# Altium PCB LM2576_V1.0.pcbdoc
Units mil, origin at the board's own origin, x right, y up, seen from the top; angles counter-clockwise.
Board outline 6000 x 4000 mil, 2 copper layers (Top Layer, Bottom Layer); 33 components, 13 nets, 184 pads, 0 vias.
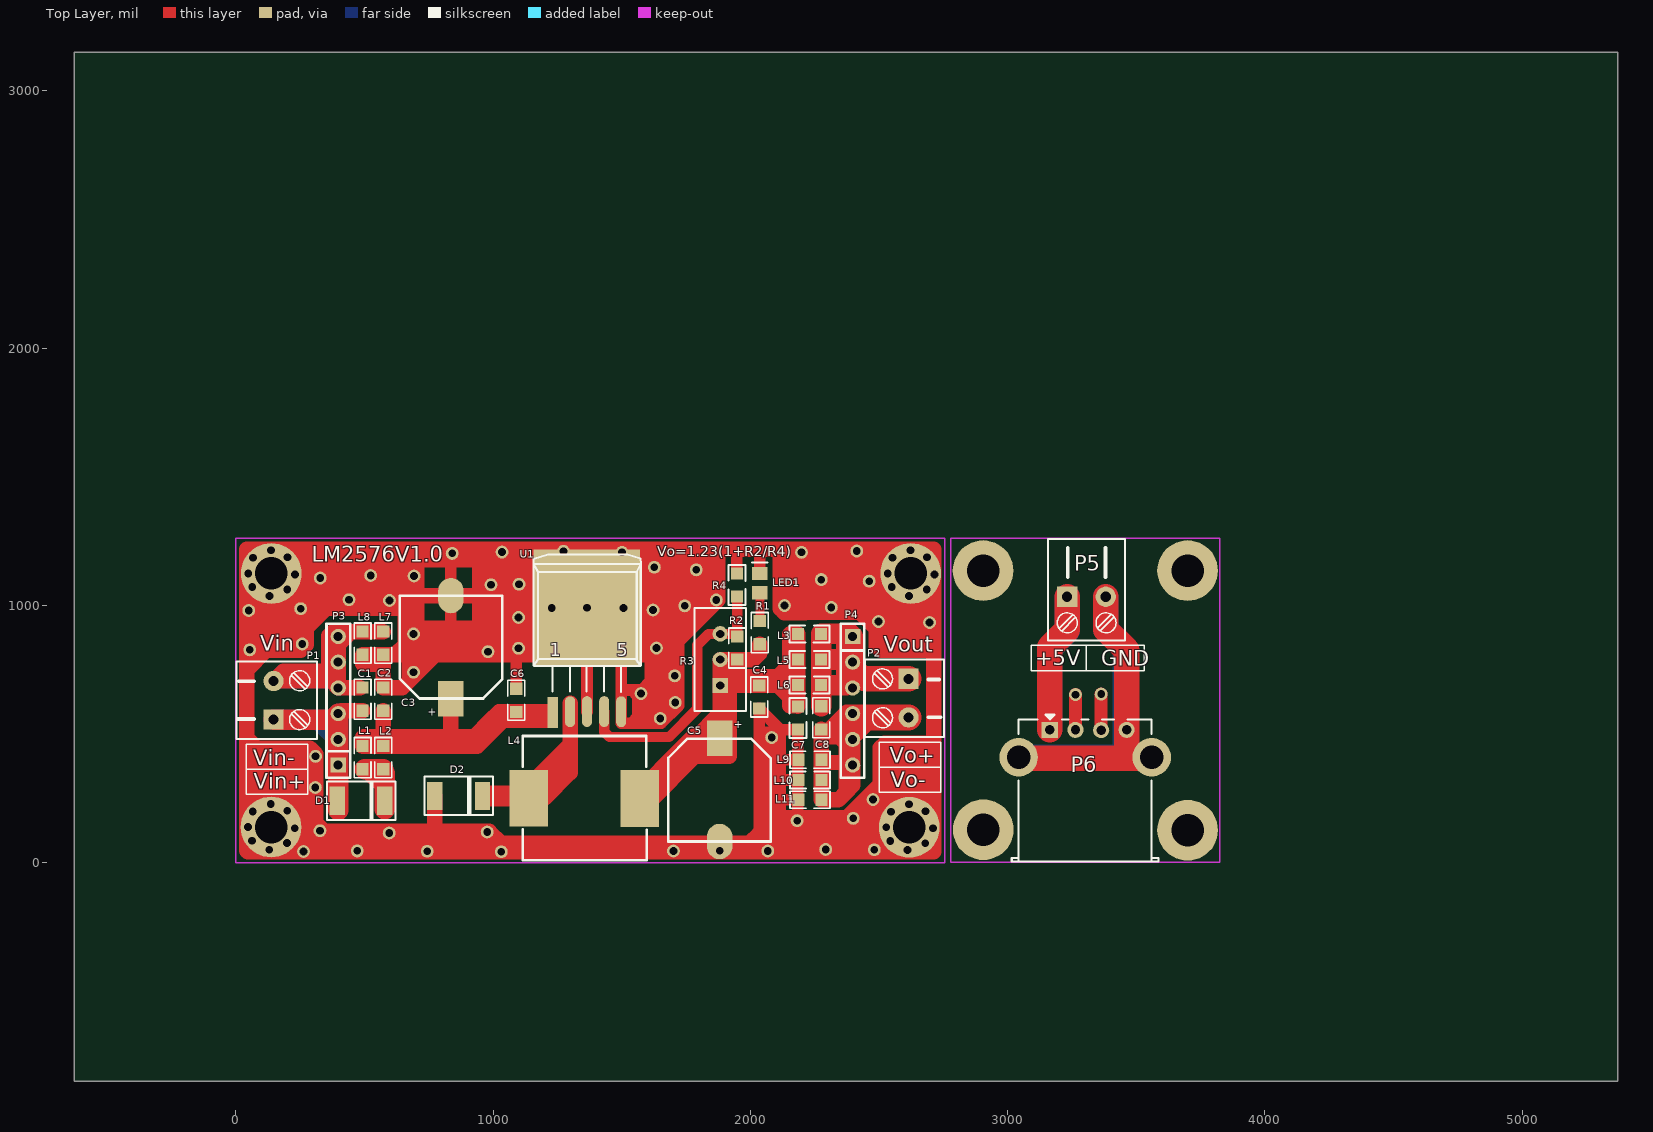
[diagram p0: Top Layer view]
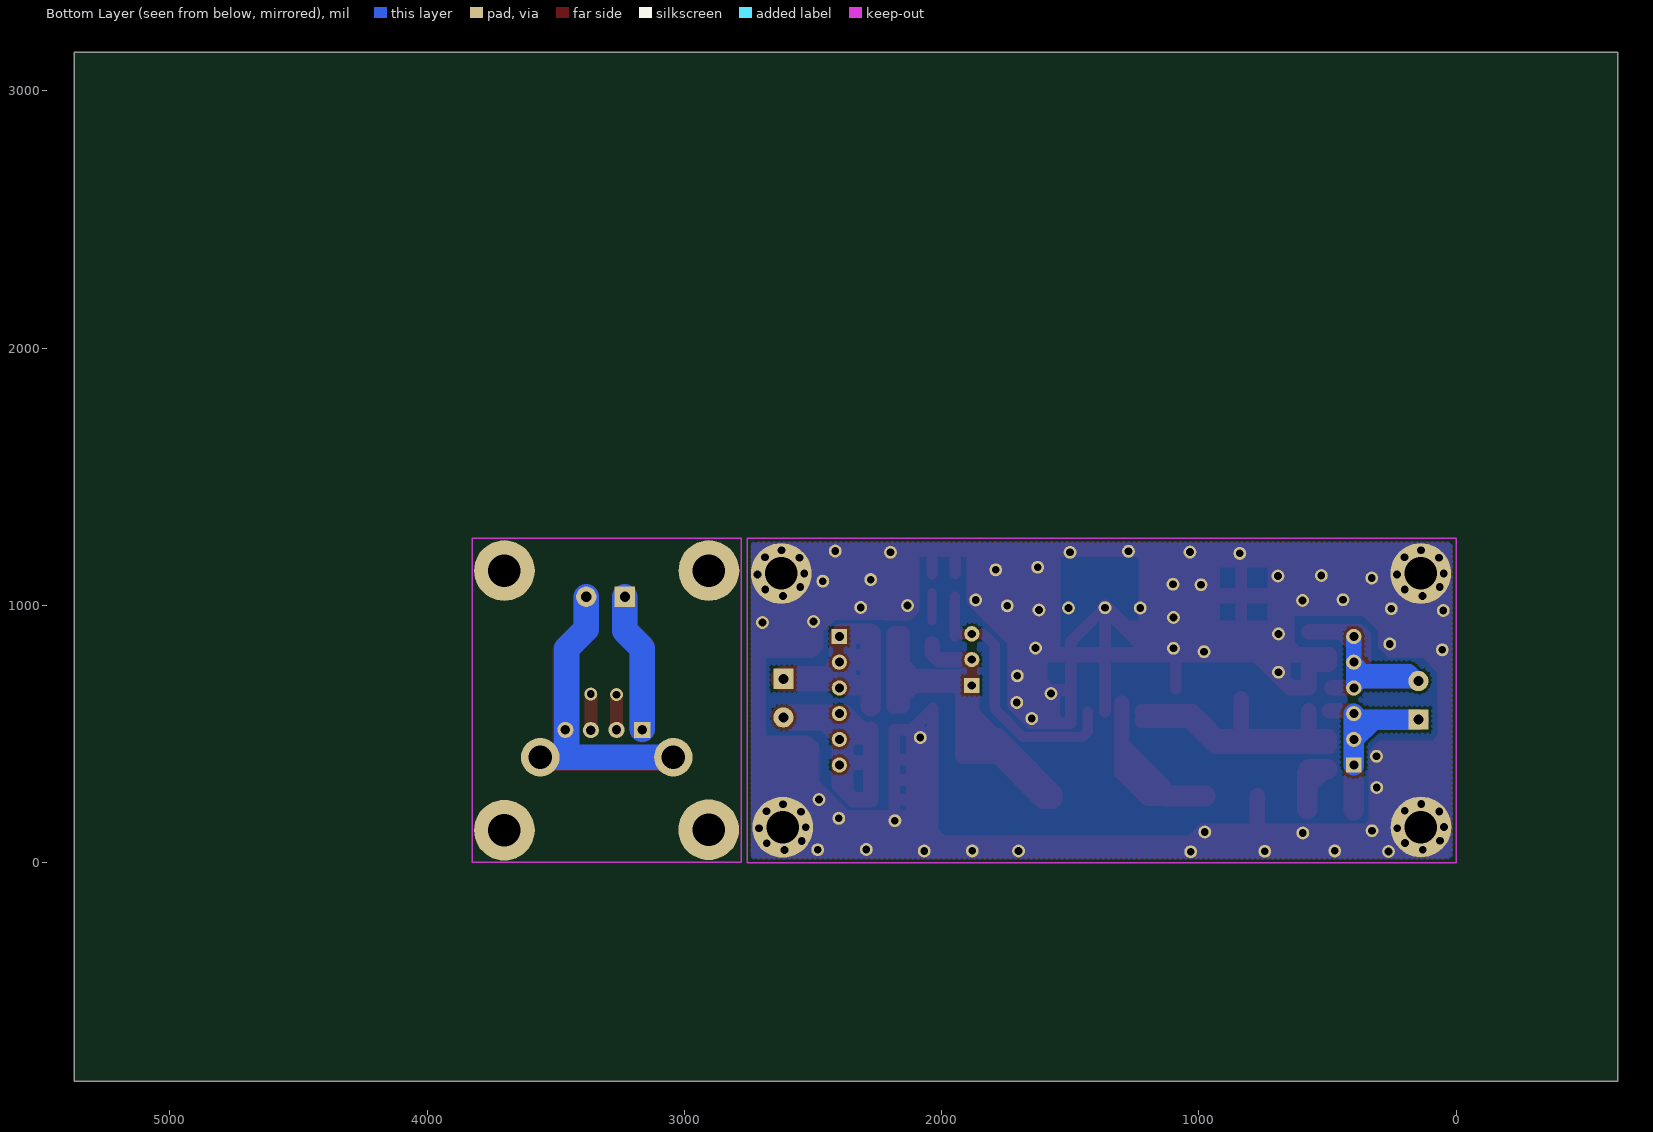
[diagram p1: Bottom Layer view, seen from below]

## Layer stack, top to bottom
Top Solder: solder mask 0.4, Solder Resist, Dk 3.5
Top Layer: signal copper 1.4
Dielectric 1: dielectric 12.6, FR-4, Dk 4.8
Bottom Layer: signal copper 1.4
Bottom Solder: solder mask 0.4, Solder Resist, Dk 3.5

## Board outline
-628,-850 5372,-850 5372,3150 -628,3150

## Design rules (kind name [scope] priority, off if disabled: settings)
Clearance [All] p1: gap=10
ComponentClearance [All] p1 off: gap=10 collisioncheckmode=3 verticalgap=10 showdistances=FALSE
MinimumSolderMaskSliver [All] p1 off: minsoldermaskwidth=10
PlaneConnect [All] p1: planeconnectstyle=Direct reliefexpansion=20 reliefentries=4 reliefconductorwidth=10 reliefairgap=10
PolygonConnect [All] p1: connectstyle=Direct reliefconductorwidth=10 reliefentries=4 polygonreliefangle="90 Angle" airgapwidth=10
RoutingVias [All] p1: holewidth=28 width=50 viastyle="Through Hole" minholewidth=28 minwidth=50 maxholewidth=28 maxwidth=50
SilkToBoardRegionClearance [All] p1 off:
SilkToSilkClearance [All] p1 off: silktosilkclearance=10
SilkToSolderMaskClearance [IsPad] p1 off: minsilkscreentomaskgap=10 clearancetoexposedcopper=TRUE
SolderMaskExpansion [All] p1: expansion=4
Width [All] p1: maxlimit=10000 minlimit=10 preferedwidth=10 minimp=50.000000 maximp=50.000000 favimp=50.000000
24 further rules are at their usual default settings.

## Components (designator, comment, footprint, x,y, rotation, side; value= is the part's Value field where it differs from the comment)
C1 "0.1U" 0805 493,680 r270 top
C2 "0.1U" 0805 573,680 r270 top
C3 "470/25V" "电容 铝电解 470U/35V" 836,638 r0 top
C4 "104" 0805 2035,599 r90 top
C5 "470/25V" "电容 铝电解 470U/35V" 1881,482 r180 top
C6 "104" 0805 1090,676 r270 top
C7 "0.1U" 0805 2185,517 r90 top
C8 "0.1U" 0805 2276,518 r90 top
D1 "IN4007" "二极管 贴片 4007" 394,240 r0 top
D2 "IN5822" "二极管 贴片 4007" 774,259 r0 top
L1 "磁珠" 0805 493,453 r270 top
L2 "磁珠" 0805 573,453 r270 top
L3 "磁珠" 0805 2185,889 r0 top
L4 "330uH" "电感 贴片 12*12" 1141,249 r0 top
L5 "磁珠" 0805 2185,789.5 r0 top
L6 "磁珠" 0805 2185,690 r0 top
L7 "磁珠" 0805 573,808 r90 top
L8 "磁珠" 0805 493,808 r90 top
L9 "磁珠" 0805 2187,400 r0 top
L10 "磁珠" 0805 2187,321 r0 top
L11 "磁珠" 0805 2187,244 r0 top
LED1 "红色" LED0805 2037,1049 r90 top
P1 "KF3.81-2P" KF127S-3.81-2P 316,481 r90 top
P2 "KF3.81-2P" KF127S-3.81-2P 2446,789 r270 top
P3 "2.54 1*6" "单排插针 2.54 1*6" 398,379 r90 top
P4 "2.54 1*6" "单排插针 2.54 1*6" 2398,879 r270 top
P5 "KF3.81-2P" KF127S-3.81-2P 3157,864 r0 top
P6 "USB座" "USB座 母头1 侧卧" 3165,515 r270 top
R1 "2K" 0805 2037,939 r270 top
R2 "6.2K" 0805 1949,789 r90 top
R3 "103" 电位器 1883,689 r90 top
R4 "2K" 0805 1948,1034 r90 top
U1 "LM2576SX-ADJ" "TO263 LM2576" 1232,583 r0 top

## Footprints (in the part's own frame and the unit in brackets; to place one, negate y for a bottom-side part, rotate by r counter-clockwise, add the part's x,y. Pads: shape width x height; smd on the part's side, far side on the other; paste and mask are expansions set on the pad)
0805 [mm]
  rect 1.2x1.2 smd: 1(0,0) 2(2.286,0)
  silkscreen extent -0.84,-0.84 3.12,0.84
KF127S-3.81-2P [mm]
  rect 2x2 hole 1: 1(1.9,4.3)
  round 2 hole 1: 2(5.71,4.3)
  silkscreen extent 0,0 7.62,7.98
LED0805 [mm] "Chip Capacitor; Body 2.0 x 1.2 mm (LxW typ)"
  rect 1.3x1.5 smd: 1(0,0) 2(1.9,0)
  silkscreen extent 2.98,-0.76 2.98,0.76
"TO263 LM2576" [mil]
  rect 39.17x120 smd: 1(0,1)
  oval 39.17x120 smd: 2(67.5,3.5) 3(133,4) 4(200,4) 5(266,3.5)
  rect 413.39x450 smd: 3(131.98,408.99)
  silkscreen extent -76,81 342,614
"USB座 母头1 侧卧" [mm] "Connector; USB1.1, Reverse Type, Thru-Hole; 4 Position; Right Angle"
  rect 1.6x1.6 hole 0.92: 1(-0.025,-0.025)
  round 1.6 hole 0.92: 2(-0.025,2.515) 3(0,5.055) 4(-0.025,7.569)
  round 3.8 hole 2.3: 5(2.685,10.045) 6(2.685,-3.095)
  silkscreen extent -1.52,-3.78 12.96,10.72
"二极管 贴片 4007" [mil]
  rect 60x110 smd: 1(0,0) 2(185,0)
  silkscreen extent -40,-74 226,75
"单排插针 2.54 1*6" [mm]
  rect 1.5x1.5 hole 0.889: 1(0,0)
  round 1.5 hole 0.889: 2(2.54,0) 3(5.08,0) 4(7.62,0) 5(10.16,0) 6(12.7,0)
  silkscreen extent -1.26,-1.18 13.97,1.15
电位器 [mm] "Potentiometer; 3 Leads"
  rect 1.5x1.5 hole 0.8: 1(0,0)
  round 1.5 hole 0.8: 2(2.54,0)
  oval 1.53x1.5 hole 0.8: 3(5.08,0)
  silkscreen extent -2.54,-2.54 7.62,2.54
"电容 铝电解 470U/35V" [mm]
  rect 2.5x3.5 smd: 1(0,-0.025)
  oval 2.5x3.5 smd: 2(0,10.16)
  silkscreen extent -5.05,0 5.08,10.16
"电感 贴片 12*12" [mil]
  rect 150x220 smd: 1(-2,1) 2(429,0)
  silkscreen extent -25,-240 457,243

## Part data
C1 C2 C7 C8: library part CAP
C3 C5: library part "电容 贴片 铝电解 470u/25V"
C4 C6: library part "电容 贴片 0805"
D1: library part DIODE
D2: library part "二极管 贴片4007"
L1 L2 L3 L5 L6 L7 L8 L9 L10 L11 R1: library part RES2
L4: library part "电感 贴片 0805"
LED1: library part "二极管 贴片发光 0805"
P1 P2 P5: library part "联结件 XH2.54-2"
P3 P4: library part "连接件 单排插针 2.54 1*6"
P6: library part "连接件 USB座"
R2 R4: library part "电阻 贴片 0805"
R3: library part "电位器 3296"
U1: library part LM2576SX-5.0, "DC-DCоƬ"

## Free pads (board coordinates)
  round 236.22 hole 125.98: 0(137,138) 0(138,1124) 0(2618,137) 0(2624,1124) 0(2905,1135) 0(2906,128) 0(3700,126) 0(3700,1135)
  round 50 hole 30: 1(47,138) 1(48,1124) 1(2528,137) 1(2534,1124) 2(229,134) 2(230,1120) 2(2710,133) 2(2716,1120) 3(136,228) 3(137,1214) 3(2617,227) 3(2623,1214) 4(130,50) 4(131,1036) 4(2611,49) 4(2617,1036) 5(63,85) 5(64,1071) 5(2544,84) 5(2550,1071) 6(199,76) 6(200,1062) 6(2680,75) 6(2686,1062) 7(200,201) 7(201,1187) 7(2681,200) 7(2687,1187) 8(66,199) 8(67,1185) 8(2547,198) 8(2553,1185) 9(54,827) 10(50,980) 11(258,850) 12(252,987) 12(263,43) 12(309,292) 12(310,413) 12(327,124) 12(328,1106) 12(440,1022) 12(472,45.5) 12(524,1116) 12(596,115) 12(597,1019) 12(691,740) 12(691,889) 12(693,1114) 12(744,44) 12(841,1202) 12(977,119) 12(980,820) 12(992,1080) 12(1032,42) 12(1035,1207) 12(1099,833) 12(1099,953) 12(1101,1082) 12(1228,990) 12(1274,1210) 12(1365,990.97) 12(1501,1206) 12(1507,990) 12(1575,657) 12(1622,982) 12(1627,1148) 12(1635,834) 12(1650,560) 12(1701,45) 12(1706,726) 12(1708,622) 12(1745,998) 12(1790,1138) 12(1868,1021) 12(1881,45.5) 12(2068,45) 12(2083,486) 12(2133,999) 12(2182,163) 12(2199,1206) 12(2276,1100) 12(2293,51) 12(2315,992) 12(2400,172) 12(2414,1211) 12(2462,1094) 12(2477,245) 12(2482,50) 12(2498,937) 12(2697,933) 13(3264,653) 14(3364,655)

## Nets (pads, with @x,y where several pads share a name; then routed paths per layer and width w, separated by ;. In a path a pad name is that pad's centre, name@x,y a point inside that pad or via, vN(x,y) a via of type N, cw(c..) or ccw(c..) an arc to the next point about the centre after c; other vN are vias at no path point)
GND: C2.1 C3.2 C4.1 C5.2 C6.1 C7.1 D2.1 L7.1 L8.1 L9.1 L10.1 L11.1 LED1.2 pad.0@137,138 pad.0@138,1124 pad.0@2618,137 pad.0@2624,1124 pad.1 pad.2 pad.3 pad.4 pad.5 pad.6 pad.7 pad.8 pad.9 pad.10 pad.11 pad.12 R4.2 U1.3 U1.5 | length 24938.6
  Top Layer w45: 830,912 836,918 C3.2 836,1177 836,1216.5 pad.12@837,1217.5 ; 1087,1217.5 1090,1214.5 1090,1178 1090,912 1090,867 1090,808 C6.1 ; U1.3@1363.98,991.99 U1.3@1365,990.97 ; U1.3@1365,587 1365,808 U1.3@1365,990.97 ; 1611,808 1611,705 1577,671 1539,671 ; 1881,1217.5 1881,1018 1722,859 1722,610 1653,541 1537,541 ; R4.2 1948,1213.5 1952,1217.5 ; 2037,42.5 2035,44.5 2035,76 2035,113.5 2035,507 ; LED1.2 2037,1215.5 2039,1217.5 ; 2182,42.5 2185,45.5 2185,76 pad.12@2185,181.5 ; L11.1 L11.1@2185,244 ; L10.1 L10.1@2185,321 ; L9.1 L9.1@2185,400 ; 2712.5,471 2521,471 2498,448 2498,306 2373.5,181.5 pad.12@2185,181.5 ; U1.3@1365,990.97 1498,857.97 1498,808 1498,671 ; 1498,671 U1.5 1498,541 1537,541 ; 1498,671 1539,671 ; 1537,541 1563,567 1563,647 1539,671 ; 2035,507 pad.12@2076,507 ; 2035,507 C4.1 2117,517 ; pad.12@2076,507 2076,150 2076,94 2094,76 2117,99 2117,186 ; pad.12@2076,507 2107,507 2117,517 ; 2117,186 2117,244 ; 2117,186 2121.5,181.5 pad.12@2185,181.5 ; 2117,244 2117,326 ; 2117,244 L11.1@2185,244 ; 2117,326 2117,408 ; 2117,326 2122,321 L10.1@2185,321 ; 2117,408 2117,517 ; 2117,408 2125,400 L9.1@2185,400 ; 2117,517 C7.1 L9.1@2185,400 ; pad.12@2185,181.5 L11.1@2185,244 ; L11.1@2185,244 L10.1@2185,321 ; L10.1@2185,321 L9.1@2185,400
  Top Layer w60: 42.5,622 42.5,483.5 ; D2.1 774,43.5 775,42.5 ; 989,1029 980,1038 948,1038 ; pad.12@1055,51 1030,76 ; 1090,1178 1089,1177 948,1177 ; U1.3@1363.98,991.99 U1.3@1283.99,912 ; 2076,150 2071.5,150 2035,113.5 1997.5,76 ; 42.5,483.5 42.5,749.5 ; 42.5,483.5 42.5,46 46,42.5 775,42.5 ; 42.5,483.5 85,441 89,445 288,445 311,422 311,154 344,121 985,121 1030,76 ; 42.5,749.5 42.5,1217.5 659,1217.5 ; 42.5,749.5 119,826 252,826 273,847 273,911 350,988 659,988 ; 573,771 496,771 495,770 493,772 L8.1 L7.1 ; 573,771 L7.1 ; 573,771 C2.1 647,680 674.5,707.5 ; L7.1 619,808 ; 619,808 704,808 ; 619,808 659,848 659,988 ; 659,988 659,1038 ; 659,1038 659,1177 ; 659,1038 704,1038 ; 659,1177 659,1217.5 ; 659,1177 704,1177 ; 659,1217.5 704,1217.5 ; 674.5,707.5 pad.12@704,737 ; 674.5,707.5 674.5,778.5 704,808 ; pad.12@704,737 775,808 ; pad.12@704,737 704,808 ; 704,808 775,808 ; 704,808 704,867 ; 704,867 704,912 ; 704,867 1090,867 U1.3@1238.99,867 ; 704,912 704,1038 ; 704,912 830,912 944,912 ; 704,1038 704,1177 ; 704,1038 C3.2 948,1038 ; 704,1177 704,1217.5 ; 704,1177 836,1177 948,1177 ; 704,1217.5 837,1217.5 1087,1217.5 1717,1217.5 ; 775,42.5 1964,42.5 ; 775,808 1090,808 U1.3@1179.99,808 ; 944,912 1090,912 U1.3@1283.99,912 ; 944,912 948,916 948,1038 ; 948,1038 948,1177 ; 1030,76 1997.5,76 ; U1.3@1179.99,808 1365,808 1498,808 1611,808 1695,808 1713,826 1713,1213.5 1717,1217.5 ; U1.3@1179.99,808 U1.3@1238.99,867 ; U1.3@1238.99,867 U1.3@1283.99,912 ; 1717,1217.5 1881,1217.5 1952,1217.5 2039,1217.5 2117,1217.5 ; 1964,42.5 2037,42.5 2182,42.5 2712.5,42.5 pad.0@2712.5,86 ; 1964,42.5 1997.5,76 ; 1997.5,76 2035,76 2094,76 2185,76 2702.5,76 pad.0@2712.5,86 ; 2117,1217.5 2712.5,1217.5 2712.5,824 ; 2117,1217.5 2117,987 2132,972 2213,972 2214,973 2426,973 2489,910 2489,842 2506,825 2711.5,825 2712.5,824 ; pad.0@2712.5,86 2712.5,471 2712.5,824
NetC1_1: C1.1 L7.2 L8.2 P1.2 P3.4 P3.5 P3.6 | length 2135.8
  Top Layer w60: C1.1@484,680 399,680 P3.4 ; L7.2 L8.2 450,898 ; 324.8,705.8 362,743 ; 324.8,705.8 371.2,705.8 P3.4 ; 324.8,705.8 P1.2 183.91,743 362,743 ; 362,743 362,882 378,898 P3.6@417,898 ; 362,743 P3.5 ; P3.4 P3.5 ; P3.5 398,846 ; 398,846 450,898 ; 398,846 P3.6 P3.6@417,898 ; P3.6@417,898 450,898
  Bottom Layer w60: P3.6 P3.5 ; 324.8,705.8 361.4,742.4 ; 324.8,705.8 371.2,705.8 P3.4 P3.5 ; 324.8,705.8 P1.2 183.31,742.4 361.4,742.4 ; 361.4,742.4 P3.5
NetC1_2: C1.2 D1.1 P1.1 P3.1 P3.2 P3.3 | length 1293.9
  Top Layer w60: P3.3 409,590 C1.2
  Top Layer w80: P1.1 374.8,555.8 P3.3 P3.2 P3.1 D1.1@398,204
  Bottom Layer w80: P1.1 374.8,555.8 P3.3 P3.2 ; 329,548 P3.2 ; P3.1 P3.2
NetC4_2: C4.2 C5.1 C7.2 L3.1 L4.2 L5.1 L6.1 R1.2 R2.1 R3.1 R3.2 | length 3589.5
  Top Layer w60: 1740,438 1749.5,428.5 1765,413 1770,413 1918,413 1918,689 ; 1784.98,482.98 1883,581 ; C5.1 1883,484.98 1883,581 ; R1.2 2037,814 2012,789 R2.1 R3.2 1883,729 ; 1883,581 R3.1 ; R3.1 1918,689 ; R3.1 1883,729 ; 1883,729 1890,722 2106,722 ; 1918,689 C4.2 2108,689 ; 2106,722 2153,722 ; 2106,722 2153,769 ; 2108,689 2153,644 ; 2108,689 2153,689 ; 2153,644 2153,689 ; 2153,644 2153,609 2183,609 C7.2 L6.1 ; 2153,689 2153,722 ; 2153,689 2184,689 L6.1 ; 2153,722 2153,769 ; 2153,769 2153,887 2155,889 L3.1 L5.1 L6.1
  Top Layer w80: L4.2 1606,249 1770,413 1795,438 ; L4.2 1749.5,428.5 1759,438 ; L4.2 1570,268 1740,438 ; 1740,438 1759,438 ; 1740,438 1784.98,482.98 C5.1 1836.02,438 1795,438 ; 1759,438 1795,438
NetC8_1: C8.1 L9.2 L10.2 L11.2 P2.2 P4.4 P4.5 P4.6 | length 1585.2
  Top Layer w50: 2285,489 2285,501 P4.4@2373,589
  Top Layer w60: C8.1 2276,480 ; L9.2 2288,389 P4.6@2373,389 ; P4.4@2387.2,564.2 2373,550 P4.5@2373,489 ; 2276,480 2276,245 L11.2 2342,244 2373,275 ; 2276,480 2285,489 P4.5@2373,489 ; 2373,275 P4.6@2373,389 ; 2373,275 2398,300 P4.6 2398,464 P4.5@2373,489 ; P4.6@2373,389 P4.5@2373,489
  Top Layer w100: P4.5@2373,489 2448.2,564.2 ; P4.4@2387.2,564.2 2448.2,564.2 ; P2.2 2448.2,564.2
NetD1_2: D1.2 L1.2 L2.2 | length 296.3
  Top Layer w80: L1.2@502,363 518,363 ; L2.2 518,363 ; D1.2@579,208 D1.2 579,302 ; L2.2@579,347 579,302 ; 518,363 579,302
NetD2_2: D2.2 L4.1 U1.2 | length 1187.4
  Top Layer w60: L4.1@1130,259 L4.1 ; 1299.5,504 1299.5,459.5 ; U1.2@1299.5,620 U1.2 1299.5,459.5 ; L4.1 1139,299 1299.5,459.5 ; L4.1 1200,250 1299.5,349.5 1299.5,410.5 ; L4.1 1299.5,410.5 ; 1299.5,410.5 1299.5,459.5
  Top Layer w80: D2.2@975,259 L4.1@1130,259
NetLED1_1: LED1.1 R1.1 | length 110
  Top Layer w35: R1.1 LED1.1
NetP5_1: P5.1 P6.1 | length 1087.4
  Top Layer w100: P6.1 3164,837 3231.8,904.8 P5.1
  Bottom Layer w100: P6.1@3164,519.31 3164,833 3231.8,900.8 P5.1
NetP5_2: P5.2 P6.4 P6.5 P6.6 | length 2363.7
  Top Layer w100: P6.6 3043.13,406 3451,406 ; P5.2 3381.8,906.2 3463,825 P6.4 3463,418 3451,406 ; P6.5 3557.15,406 3451,406
  Bottom Layer w100: P6.6 3465,409.31 ; P5.2 3381.8,908.2 3458,832 3458,416.31 3465,409.31 ; P6.5 3465,409.31
NetR2_2: R2.2 R3.3 R4.1 U1.4 | length 1074
  Top Layer w40: U1.4 1432,509 1453,488 1684,488 1794,598 1794,845 1838,889 R3.3 1939,889 R2.2 1949,1033 R4.1
VCC_5V: C8.2 L3.2 L5.2 L6.2 P2.1 P4.1 P4.2 P4.3 | length 1278.7
  Top Layer w80: L5.2 L5.2@2276,789.5 ; C8.2 L6.2@2276,689 ; P4.3@2373,689 P4.3@2372,690 ; L6.2@2276,689 L6.2@2276,690 ; L6.2@2276,689 L6.2 L6.2@2276,690 ; L6.2@2276,690 P4.3@2372,690 ; L6.2@2276,690 L5.2@2276,789.5 ; L5.2@2276,789.5 2372.5,789.5 P4.2@2373,789 ; L5.2@2276,789.5 2276,888 L3.2 P4.1@2373,889 ; P4.3@2372,690 P4.3@2373,691 ; P4.3@2373,691 2396.2,714.2 2447.8,714.2 2398,764 P4.2 P4.1 2388,889 P4.1@2373,889 ; P4.3@2373,691 P4.2@2373,789 ; P4.2@2373,789 P4.1@2373,889
  Top Layer w100: P4.2@2373,789 P4.2@2398,764 ; 2447.8,714.2 P2.1
VCC_IN: C2.2 C3.1 C6.2 L1.1 L2.1 U1.1 | length 1962.3
  Top Layer w60: C2.2 573,489 ; C3.1 836,491 838,489 ; U1.1@1220,554 1040,554 ; U1.1@1220,586 C6.2 1023,586 991,554 ; 569,489 573,489 ; 569,489 573,485 ; 569,489 495,489 493,487 L1.1 L2.1 ; L2.1 890,453 ; L2.1 573,485 ; 573,485 573,489 ; 573,489 838,489 ; 838,489 926,489 ; 890,453 939,453 1040,554 ; 890,453 926,489 ; 926,489 991,554 ; 991,554 1040,554
pads on no net: P6.2 P6.3
copper on no net: | length 277
  Top Layer w50: 3264,516 3264,653 ; 3364,515 3364,655

## Polygon pours and split planes (outlines as drawn)
GND on Bottom Layer "Bottom Layer-No Net" (hatched 90Degree grid 20 track 20, remove dead copper, pour order 5): 0,1260 2761,1260 2769,1252 2755,1238 2755,0 0,0

## Keep-outs
Keep-Out Layer:
  lines w5: 3616,2 3825,2 ; 3825,2 2780,2 2780,1260 3825,1260 3825,2 ; 0,0 0,1260 2755,1260 2755,0 0,0

## Other copper
Top Layer:
  rectangle net GND: 947,901 1235,1217
  region net GND: 2117,1217.5 2712.5,1217.5 2712.5,824 2507,824 2467,864 2467,931 2426,972 2426,973 2120,973 2116,977 2116,1216.5
  region net GND: 1553,1212 1873,1212 1881,1204 1881,1008 1729,856 1729,622 1643,536 1631,548 1557,548 1557,652 1597,692 1606,692 1606,803 1611,808 1600,819 1539,819 1539,1215 1540,1216
  region net GND: 2523,482 2525,484 2735,484 2735,64 2738,61 2139,61 2139,171 2158,190 2403,190 2476,263 2476,428
  region net GND: 45,446 46,445 288,445 323,410 316,403 316,145 340,121 985,121 985,108 1045,48 1030,33 48,33
  region net GND: 41,1227 55,1213 663,1213 663,1006 645,988 346,988 273,915 273,847 269,847 239,817 223,833 104,833 104,811 42.5,749.5 32,760 32,1222

## Silkscreen, mask and mechanical layers (free items; w line width, h text height)
Top Overlay:
  lines w5: 41,363 280,363 ; 2501,371 2740,371 ; 3305,745 3305,845 3306,845 ; 41,266 41,460 280,460 280,266 41,266 ; 2501,274 2740,274 2740,468 2501,468 2501,274 ; 3092,745 3092,845 3531,845 3531,745 3092,745
  text "Vo=1.23(1+R2/R4)" at 1638,1191 h40
  text "LM2576V1.0" at 296,1170 h60
  text "Vin" at 95,823 h60
  text "Vout" at 2518,820 h60
  text "+5V" at 3107,768 h60
  text "GND" at 3365,765 h60
  text "Vo+" at 2542,388 h60
  text "Vin-" at 68,378 h60
  text "Vo-" at 2545,292 h60
  text "Vin+" at 69,287 h60
Mechanical 1:
  lines w5: 4,630 2752,628

## Text inside footprints (layer, text, board x,y; h text height)
C3: Top Overlay "+" at 746,570 h30
C5: Top Overlay "+" at 1971,550 h30 r180
U1: Top Overlay "5" at 1481,802.5 h50; Top Overlay "1" at 1221,802.5 h50